# Altium PCB LDR front.PcbDoc
Units mm, origin at the board's own origin, x right, y up, seen from the top; angles counter-clockwise.
Board outline 56.5 x 67.5 mm, 2 copper layers (Top Layer, Bottom Layer); 39 components, 19 nets, 103 pads, 9 vias.
Unrouted connection lines stored in the file: 10.
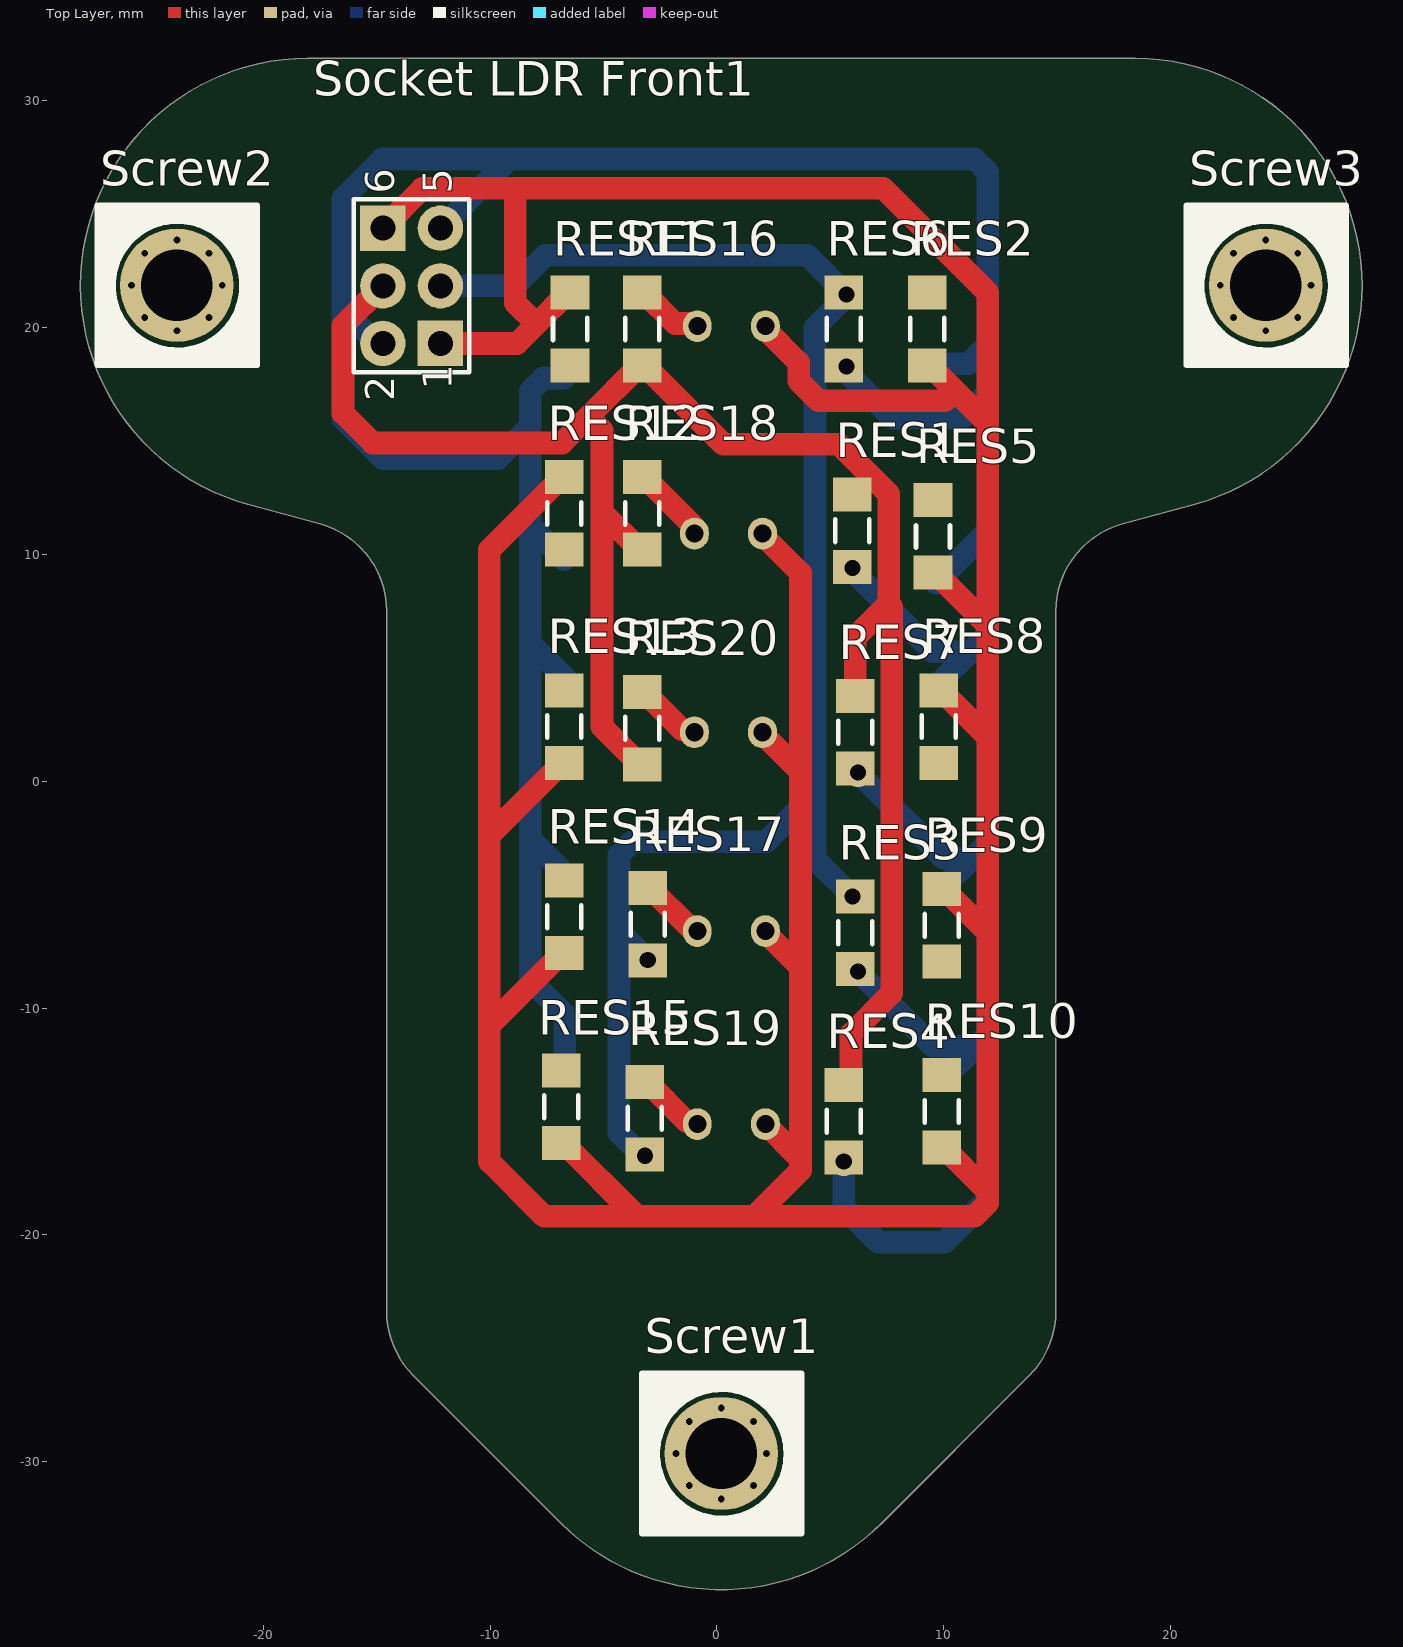
[diagram p0: Top Layer view]
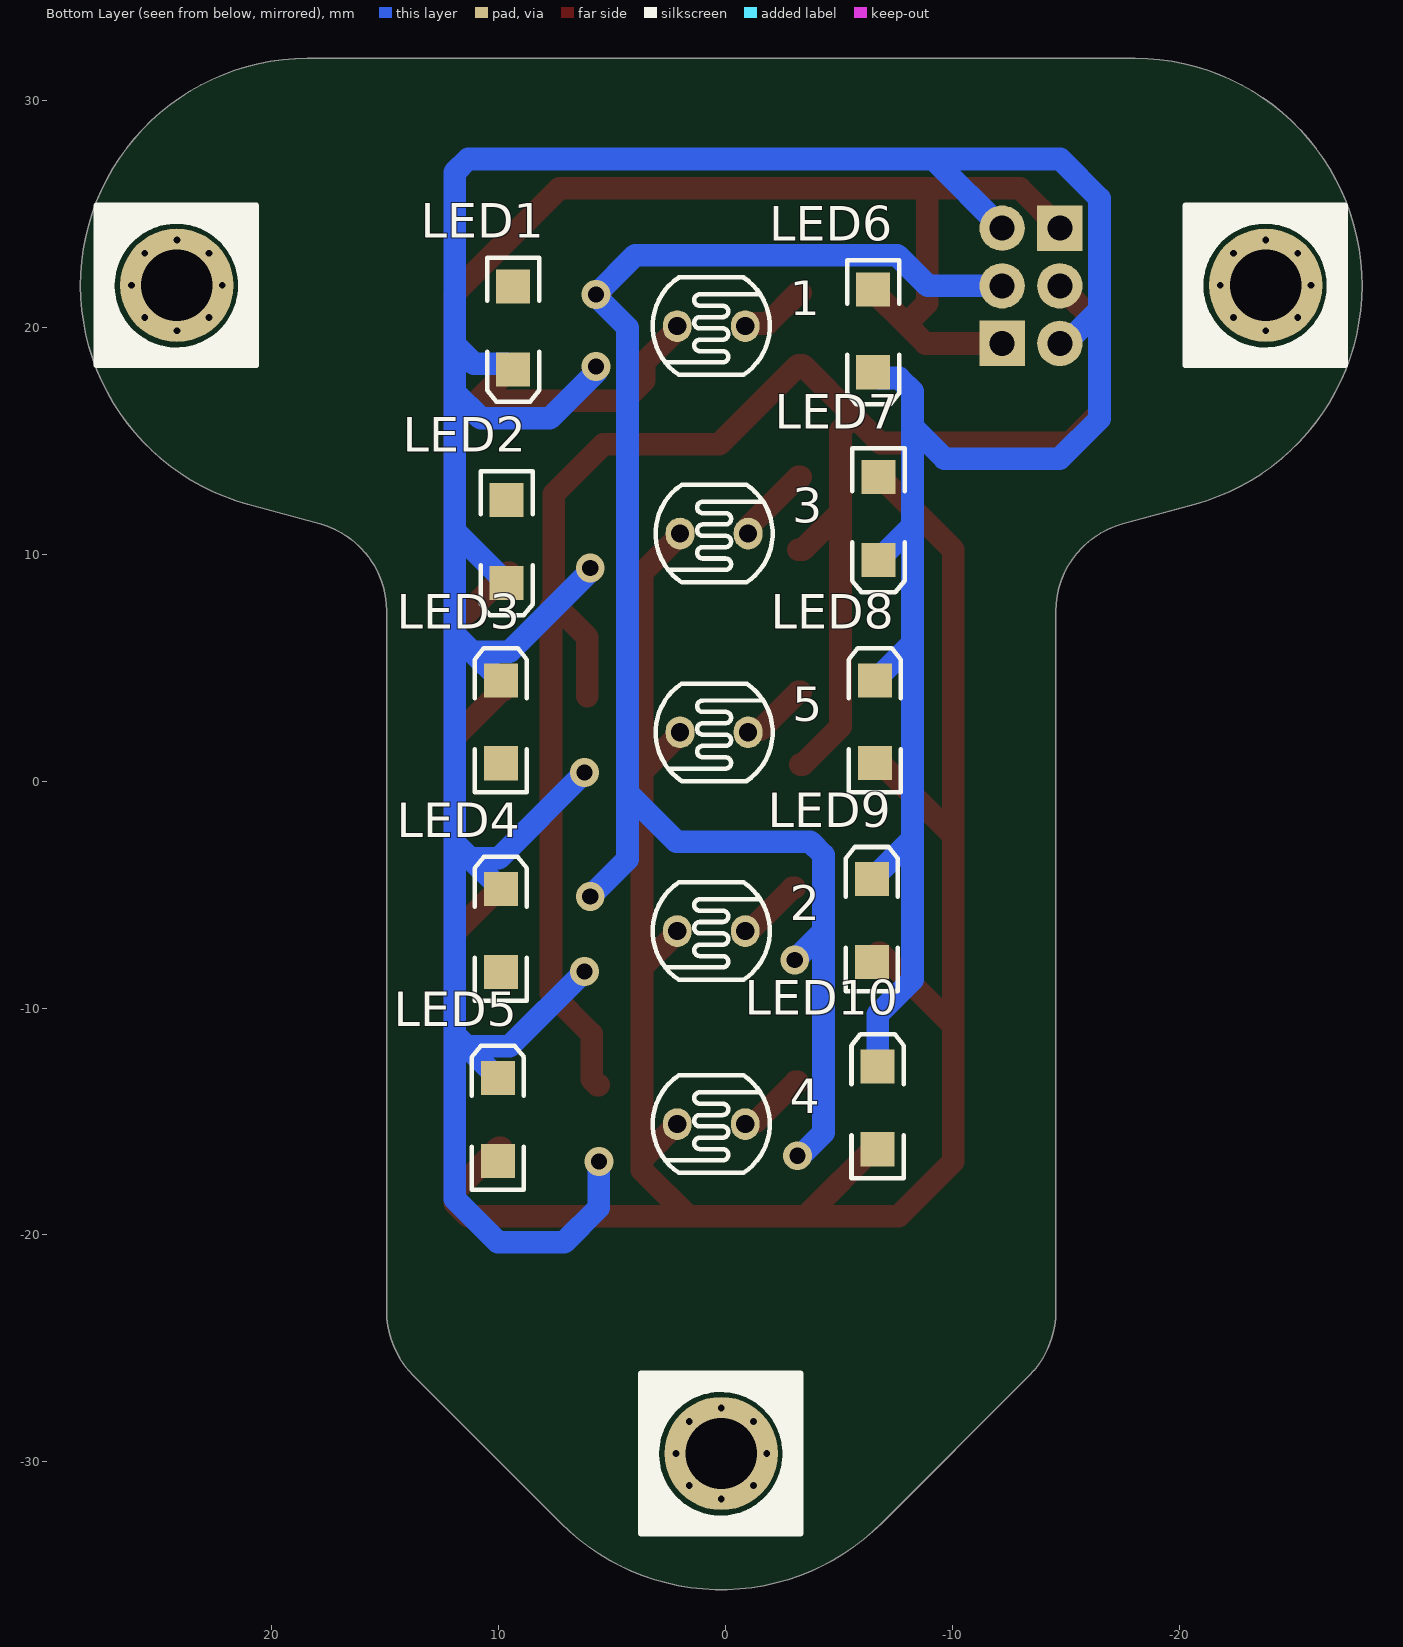
[diagram p1: Bottom Layer view, seen from below]

## Layer stack, top to bottom
Top Solder: solder mask 0.0102, Solder Resist, Dk 3.5
Top Layer: signal copper 0.0356
Dielectric 1: dielectric 0.32, FR-4, Dk 4.8
Bottom Layer: signal copper 0.0356
Bottom Solder: solder mask 0.0102, Solder Resist, Dk 3.5

## Board outline
-13.387,-26.198 cw(c-10.559,-23.37) -14.559,-23.37 -14.559,7.49 ccw(c-18.559,7.49) -17.506,11.349 -20.69,12.218 cw(c-18.059,21.865) -18.059,31.865 18.441,31.865 cw(c18.441,21.865) 21.072,12.218 17.889,11.349 ccw(c18.941,7.49) 14.941,7.49 14.941,-23.37 cw(c10.941,-23.37) 13.77,-26.198 7.262,-32.706 cw(c0.191,-25.635) -6.88,-32.706

## Design rules (kind name [scope] priority, off if disabled: settings)
Clearance [All] p1: gap=0.254 ignorepadtopadclearanceinfootprint=FALSE except(0: Arc-Hole Track-Hole SMDPad-Hole THPad-Hole Via-Hole Fill-Hole Poly-Hole Region-Hole Text-Hole)
HoleSize [All] p1: absolutevalues=TRUE maxlimit=5 minlimit=0.025 maxpercent=80.000 minpercent=20.000
PolygonConnect [All] p1: connectstyle=Relief reliefconductorwidth=0.254 reliefentries=4 polygonreliefangle="90 Angle" airgapwidth=0.254
RoutingVias [All] p1: holewidth=0.711 width=1.27 viastyle="Through Hole" minholewidth=0.711 minwidth=1.27 maxholewidth=0.711 maxwidth=1.27
SolderMaskExpansion [All] p1: expansion=0.102 istentingtop=FALSE
SupplyNets "Schematic Supply Nets_1" [InNet('GND')] p1: voltage=0.000
SupplyNets "Schematic Supply Nets" [InNet('+5')] p2: voltage=0.000
Width [All] p1: maxlimit=2 minlimit=0.5 preferedwidth=1
29 further rules are at their usual default settings.

## Components (designator, comment, footprint, x,y, rotation, side; value= is the part's Value field where it differs from the comment)
1 "Photo Cell" PhotoCell. 0.635,20.066 r0 bottom
2 "Photo Cell" PhotoCell. 0.635,-6.604 r0 bottom
3 "Photo Cell" PhotoCell. 0.508,10.922 r0 bottom
4 "Photo Cell" PhotoCell. 0.635,-15.113 r0 bottom
5 "Photo Cell" PhotoCell. 0.508,2.159 r0 bottom
LED1 "SMD" "LED SMD" 9.398,19.685 r270 bottom
LED2 "SMD" "LED SMD" 9.677,10.27 r270 bottom
LED3 "SMD" "LED SMD" 9.881,2.92 r90 bottom
LED4 "SMD" "LED SMD" 9.881,-6.275 r90 bottom
LED5 "SMD" "LED SMD" 10.008,-14.606 r90 bottom
LED6 "SMD" "LED SMD" -6.477,19.558 r270 bottom
LED7 "SMD" "LED SMD" -6.706,11.286 r270 bottom
LED8 "SMD" "LED SMD" -6.604,2.921 r90 bottom
LED9 "SMD" "LED SMD" -6.477,-5.842 r90 bottom
LED10 "SMD" "LED SMD" -6.731,-14.097 r90 bottom
RES1 "SMD" "Resistor SMD 1206" 5.969,11.049 r90 top
RES2 "SMD" "Resistor SMD 1206" 9.271,19.939 r90 top
RES3 "SMD" "Resistor SMD 1206" 6.096,-6.68 r90 top
RES4 "SMD" "Resistor SMD 1206" 5.588,-14.986 r90 top
RES5 "SMD" "Resistor SMD 1206" 9.525,10.795 r90 top
RES6 "SMD" "Resistor SMD 1206" 5.588,19.939 r90 top
RES7 "SMD" "Resistor SMD 1206" 6.096,2.159 r90 top
RES8 "SMD" "Resistor SMD 1206" 9.779,2.413 r270 top
RES9 "SMD" "Resistor SMD 1206" 9.906,-6.35 r270 top
RES10 "SMD" "Resistor SMD 1206" 9.906,-14.554 r90 top
RES11 "SMD" "Resistor SMD 1206" -6.477,19.939 r270 top
RES12 "SMD" "Resistor SMD 1206" -6.731,11.811 r270 top
RES13 "SMD" "Resistor SMD 1206" -6.731,2.413 r90 top
RES14 "SMD" "Resistor SMD 1206" -6.731,-5.969 r90 top
RES15 "SMD" "Resistor SMD 1206" -6.858,-14.351 r90 top
RES16 "SMD" "Resistor SMD 1206" -3.302,19.939 r90 top
RES17 "SMD" "Resistor SMD 1206" -3.048,-6.299 r90 top
RES18 "SMD" "Resistor SMD 1206" -3.302,11.811 r90 top
RES19 "SMD" "Resistor SMD 1206" -3.175,-14.859 r90 top
RES20 "SMD" "Resistor SMD 1206" -3.302,2.337 r90 top
Screw1 "Screw" Screw 0.191,-29.635 r0 top locked
Screw2 "Screw" Screw -23.809,21.865 r0 top locked
Screw3 "Screw" Screw 24.191,21.865 r0 top locked
"Socket LDR Front1" "IDC 2X3" "IDC 2X3" -13.462,21.844 r90 top

## Footprints (in the part's own frame and the unit in brackets; to place one, negate y for a bottom-side part, rotate by r counter-clockwise, add the part's x,y. Pads: shape width x height; smd on the part's side, far side on the other; paste and mask are expansions set on the pad)
"IDC 2X3" [mm] "DS1013-6"
  rect 2x2 hole 1.1: 1(-2.54,-1.27) 6(2.54,1.27)
  round 2 hole 1.1: 2(-2.54,1.27) 3(0,-1.27) 4(0,1.27) 5(2.54,-1.27)
  silkscreen extent -3.81,-2.54 3.81,2.54, body extent -7.62,-4.86 7.62,4.59, height 9.1
"LED SMD" [mm]
  rect 1.5x1.5 smd: 1(-2.125,0.025) 2(1.525,0.025)
  silkscreen extent -3.4,-1.12 2.95,1.18, body extent -1.92,-0.7 1.38,0.75, height 1.36
PhotoCell. [mm]
  oval 1.27x1.397 hole 0.8: 1(-1.5,0) 2(1.5,0)
  silkscreen extent -2.58,-2.15 2.58,2.15, body extent -2.61,-2.16 2.61,2.14, height 2.74
"Resistor SMD 1206" [mm]
  rect 1.5x1.7 smd: 1(-1.6,0) 2(1.6,0)
  silkscreen extent -0.5,-0.75 0.5,0.75, body extent -1.6,-0.8 1.6,0.8, height 0.55
Screw [mm]
  round 0.6 hole 0.3: S(-2,0) S(-1.414,-1.414) S(-1.414,1.414) S(0,-2) S(0,2) S(1.414,-1.414) S(1.414,1.414) S(2,0)
  round 5 hole 3.15 mask+0.1: S(0,0)
  silkscreen extent -3.49,-3.53 3.56,3.52, body extent -2.8,-2.8 2.8,2.8, height 3.88

## Part data
1 2 3 4 5: library part "Photo Cell..", LatestRevisionDate=17-Jul-2002, LatestRevisionNote="Re-released for DXP Platform.", Publisher="Altium Limited"
LED1 LED2 LED3 LED4 LED5 LED6 LED7 LED8 LED9 LED10: library part "LED SMD"
RES1 RES2 RES3 RES4 RES5 RES6 RES7 RES8 RES9 RES10 RES11 RES12 RES13 RES14 RES15 RES16 RES17 RES18 RES19 RES20: library part "Res SMD"
Screw1 Screw2 Screw3: LatestRevisionDate=17-Jul-2002, LatestRevisionNote="Re-released for DXP Platform.", Publisher="Altium Limited"

## Via types
v1: diameter 1.27, hole 0.711, Top Layer to Bottom Layer, 9 vias

## Nets (pads, with @x,y where several pads share a name; then routed paths per layer and width w, separated by ;. In a path a pad name is that pad's centre, name@x,y a point inside that pad or via, vN(x,y) a via of type N, cw(c..) or ccw(c..) an arc to the next point about the centre after c; other vN are vias at no path point)
+5: 1.2 2.2 3.2 4.2 5.2 "Socket LDR Front1.1" "Socket LDR Front1.6" RES2.1 RES5.1 RES8.1 RES9.1 RES10.1 RES11.1 RES12.1 RES13.1 RES14.1 RES15.1 | length 215.7
  Top Layer w1: -14.732,24.384 -12.978,26.138 -8.89,26.138 ; -12.192,19.304 -8.812,19.304 -7.962,20.154 ; RES15.1 -6.758,-15.951 -3.532,-19.177 ; RES14.1 -6.831,-7.569 -10.033,-10.771 ; RES13.1 -6.831,0.813 -10.033,-2.389 ; RES12.1 -6.831,13.411 -10.033,10.209 -10.033,-2.389 ; RES11.1 -6.577,21.539 -7.962,20.154 ; 5.2 2.008,2.095 3.683,0.42 ; 3.2 2.008,10.858 3.683,9.183 3.683,0.42 ; 4.2 2.145,-15.113 3.542,-16.51 3.683,-16.51 ; 2.2 2.135,-6.667 3.683,-8.216 ; 1.2 2.135,19.929 3.601,18.464 3.601,17.66 4.481,16.78 10.049,16.78 10.49,17.22 ; RES2.1 9.371,18.339 10.49,17.22 ; RES5.1 9.625,9.195 11.938,6.882 ; RES8.1 9.879,4.013 11.938,1.954 ; RES10.1 10.006,-16.154 11.886,-18.034 11.938,-18.034 ; RES9.1 10.006,-4.75 11.86,-6.604 11.938,-6.604 ; -10.033,-10.771 -10.033,-2.389 ; -10.033,-10.771 -10.033,-16.764 -7.62,-19.177 -3.532,-19.177 ; -8.89,26.138 7.338,26.138 11.938,21.538 11.938,16.002 ; -8.89,26.138 -8.89,21.082 -7.962,20.154 ; -3.532,-19.177 1.651,-19.177 ; 1.651,-19.177 11.352,-19.177 11.938,-18.591 11.938,-18.034 ; 1.651,-19.177 3.683,-17.145 3.683,-16.51 ; 3.683,-16.51 3.683,-8.216 ; 3.683,-8.216 3.683,0.42 ; 10.49,17.22 11.708,16.002 11.938,16.002 ; 11.938,-18.034 11.938,-6.604 ; 11.938,-6.604 11.938,1.954 ; 11.938,1.954 11.938,6.882 ; 11.938,6.882 11.938,16.002
Front1: "Socket LDR Front1.3" RES3.2 RES6.2 RES17.1 RES19.1 | length 72.6
  Top Layer w1: RES6.2@5.488,21.539 RES6.2 5.664,21.463 v1(5.715,21.463)
  Bottom Layer w1: -12.192,21.844 -8.907,21.844 -7.564,23.187 3.991,23.187 v1(5.715,21.463) 5.715,21.39 4.326,20.001 4.326,-0.508 ; v1(-3.175,-16.51) -3.302,-16.51 -4.318,-15.494 -4.318,-6.604 ; v1(-3.048,-7.874) -4.318,-6.604 ; v1(5.969,-5.08) 4.326,-3.437 4.326,-0.508 ; -4.318,-6.604 -4.318,-3.253 -3.732,-2.667 2.167,-2.667 4.326,-0.508
Front2: "Socket LDR Front1.4" RES1.2 RES4.2 RES7.2 RES16.1 RES18.1 RES20.1 | length 85.3
  Top Layer w1: -14.732,21.843 -16.486,20.089 -16.486,16.232 -15.169,14.915 -6.826,14.915 -5.663,16.078 ; RES20.1 -3.402,0.737 -5.066,2.401 -5.066,11.875 ; RES18.1@-3.202,10.211 RES18.1 -3.402,10.211 -5.066,11.875 ; RES4.2 5.656,-13.386 5.906,-13.136 5.906,-11.136 7.7,-9.342 7.7,7.697 7.573,7.824 ; RES7.2 6.096,6.347 7.573,7.824 ; -5.663,16.078 -5.066,15.48 -5.066,11.875 ; -5.663,16.078 -3.402,18.339 RES16.1 -3.202,18.339 0.278,14.859 5.383,14.859 7.573,12.669 7.573,7.824
GND: "Socket LDR Front1.2" "Socket LDR Front1.5" LED1.2 LED2.2 LED3.2 LED4.2 LED5.2 LED6.2 LED7.2 LED8.2 LED9.2 LED10.2 RES1.1 RES3.1 RES4.1 RES6.1 RES7.1 | length 192.4
  Bottom Layer w1: -14.732,19.304 -14.986,19.304 -16.486,20.804 ; -12.192,24.384 -9.144,27.432 ; LED7.2 -8.235,11.265 ; LED10.2 -6.706,-10.279 -8.235,-8.75 -8.235,-2.534 ; LED8.2 -8.235,6.102 ; LED6.2 -6.752,17.783 -7.649,17.783 -8.235,17.197 -8.235,15.641 ; LED9.2 -8.235,-2.534 ; v1(5.588,-16.764) 5.588,-18.796 7.112,-20.32 10.033,-20.32 11.938,-18.415 11.938,-11.176 ; v1(5.715,18.288) 5.715,18.034 7.747,16.002 10.795,16.002 11.938,17.145 ; v1(5.969,9.398) 5.969,9.271 9.525,5.715 11.176,5.715 ; v1(6.223,-8.382) 9.525,-11.684 11.43,-11.684 ; v1(6.223,0.381) 9.995,-3.391 11.265,-3.391 ; LED1.2 9.623,18.41 11.093,18.41 11.938,19.255 ; LED2.2 11.938,11.031 ; LED4.2 11.265,-3.391 ; LED3.2 11.176,5.715 ; LED5.2 11.43,-11.684 ; -16.486,20.804 -16.486,25.696 -14.75,27.432 -9.144,27.432 ; -16.486,20.804 -16.486,15.978 -14.732,14.224 -9.652,14.224 -8.235,15.641 ; -9.144,27.432 11.352,27.432 11.938,26.846 11.938,19.255 ; -8.235,-2.534 -8.235,6.102 ; -8.235,6.102 -8.235,11.265 ; -8.235,11.265 -8.235,15.641 ; 11.176,5.715 11.938,6.477 ; 11.265,-3.391 11.938,-2.718 ; 11.43,-11.684 11.938,-11.176 ; 11.938,-11.176 11.938,-2.718 ; 11.938,-2.718 11.938,6.477 ; 11.938,6.477 11.938,11.031 ; 11.938,11.031 11.938,17.145 ; 11.938,17.145 11.938,19.255
Net1_1: 1.1 RES16.2 | length 3
  Top Layer w1: RES16.2 -3.202,21.539 -1.844,20.181 -0.98,20.181 1.1
Net2_1: 2.1 RES17.2 | length 3
  Top Layer w1: RES17.2 -2.948,-4.699 -1.158,-6.489 -0.98,-6.489 2.1
Net3_1: 3.1 RES18.2 | length 3.5
  Top Layer w1: RES18.2 -3.202,13.411 -1.044,11.253 -1.044,10.974 3.1
Net4_1: 4.1 RES19.2 | length 3.1
  Top Layer w1: RES19.2 -3.075,-13.259 -1.336,-14.998 -0.98,-14.998 4.1
Net5_1: 5.1 RES20.2 | length 3
  Top Layer w1: RES20.2 -3.202,3.937 -1.539,2.274 -1.107,2.274 5.1
NetLED1_1: LED1.1 RES2.2
NetLED2_1: LED2.1 RES5.2
NetLED3_1: LED3.1 RES8.2
NetLED4_1: LED4.1 RES9.2
NetLED5_1: LED5.1 RES10.2
NetLED6_1: LED6.1 RES11.2
NetLED7_1: LED7.1 RES12.2
NetLED8_1: LED8.1 RES13.2
NetLED9_1: LED9.1 RES14.2
NetLED10_1: LED10.1 RES15.2
pads on no net: Screw1.S Screw2.S Screw3.S

## Silkscreen, mask and mechanical layers (free items; w line width, h text height)
Mechanical 1:
  circle w0.013: c24.191,21.865 r1.55
  circle w0.013: c-23.809,21.865 r1.55
  circle w0.013: c0.191,-29.635 r1.55
  lines w0.013: -12.344,29.446 12.656,29.446 ; -12.344,29.446 -12.344,-23.554 ccw(c-10.344,-23.554) -10.344,-25.554 10.656,-25.554 ccw(c10.656,-23.554) 12.656,-23.554 12.656,29.446 ; -20.69,12.218 cw(c-18.059,21.865) -18.059,31.865 18.441,31.865 cw(c18.441,21.865) 21.072,12.218 17.889,11.349 ccw(c18.941,7.49) 14.941,7.49 14.941,-23.37 cw(c10.941,-23.37) 13.77,-26.198 7.262,-32.706 cw(c0.191,-25.635) -6.88,-32.706 -13.387,-26.198 cw(c-10.559,-23.37) -14.559,-23.37 -14.559,7.49 ccw(c-18.559,7.49) -17.506,11.349 -20.69,12.218

## Text inside footprints (layer, text, board x,y; h text height)
"Socket LDR Front1": Top Overlay "6" at -14.224,25.908 h1.27 r90; Top Overlay "5" at -11.684,25.908 h1.27 r90; Top Overlay "2" at -14.224,16.764 h1.27 r90; Top Overlay "1" at -11.684,17.272 h1.27 r90